# EAGLE board Dual 13EM7 Board Second (EAGLE 5.11)
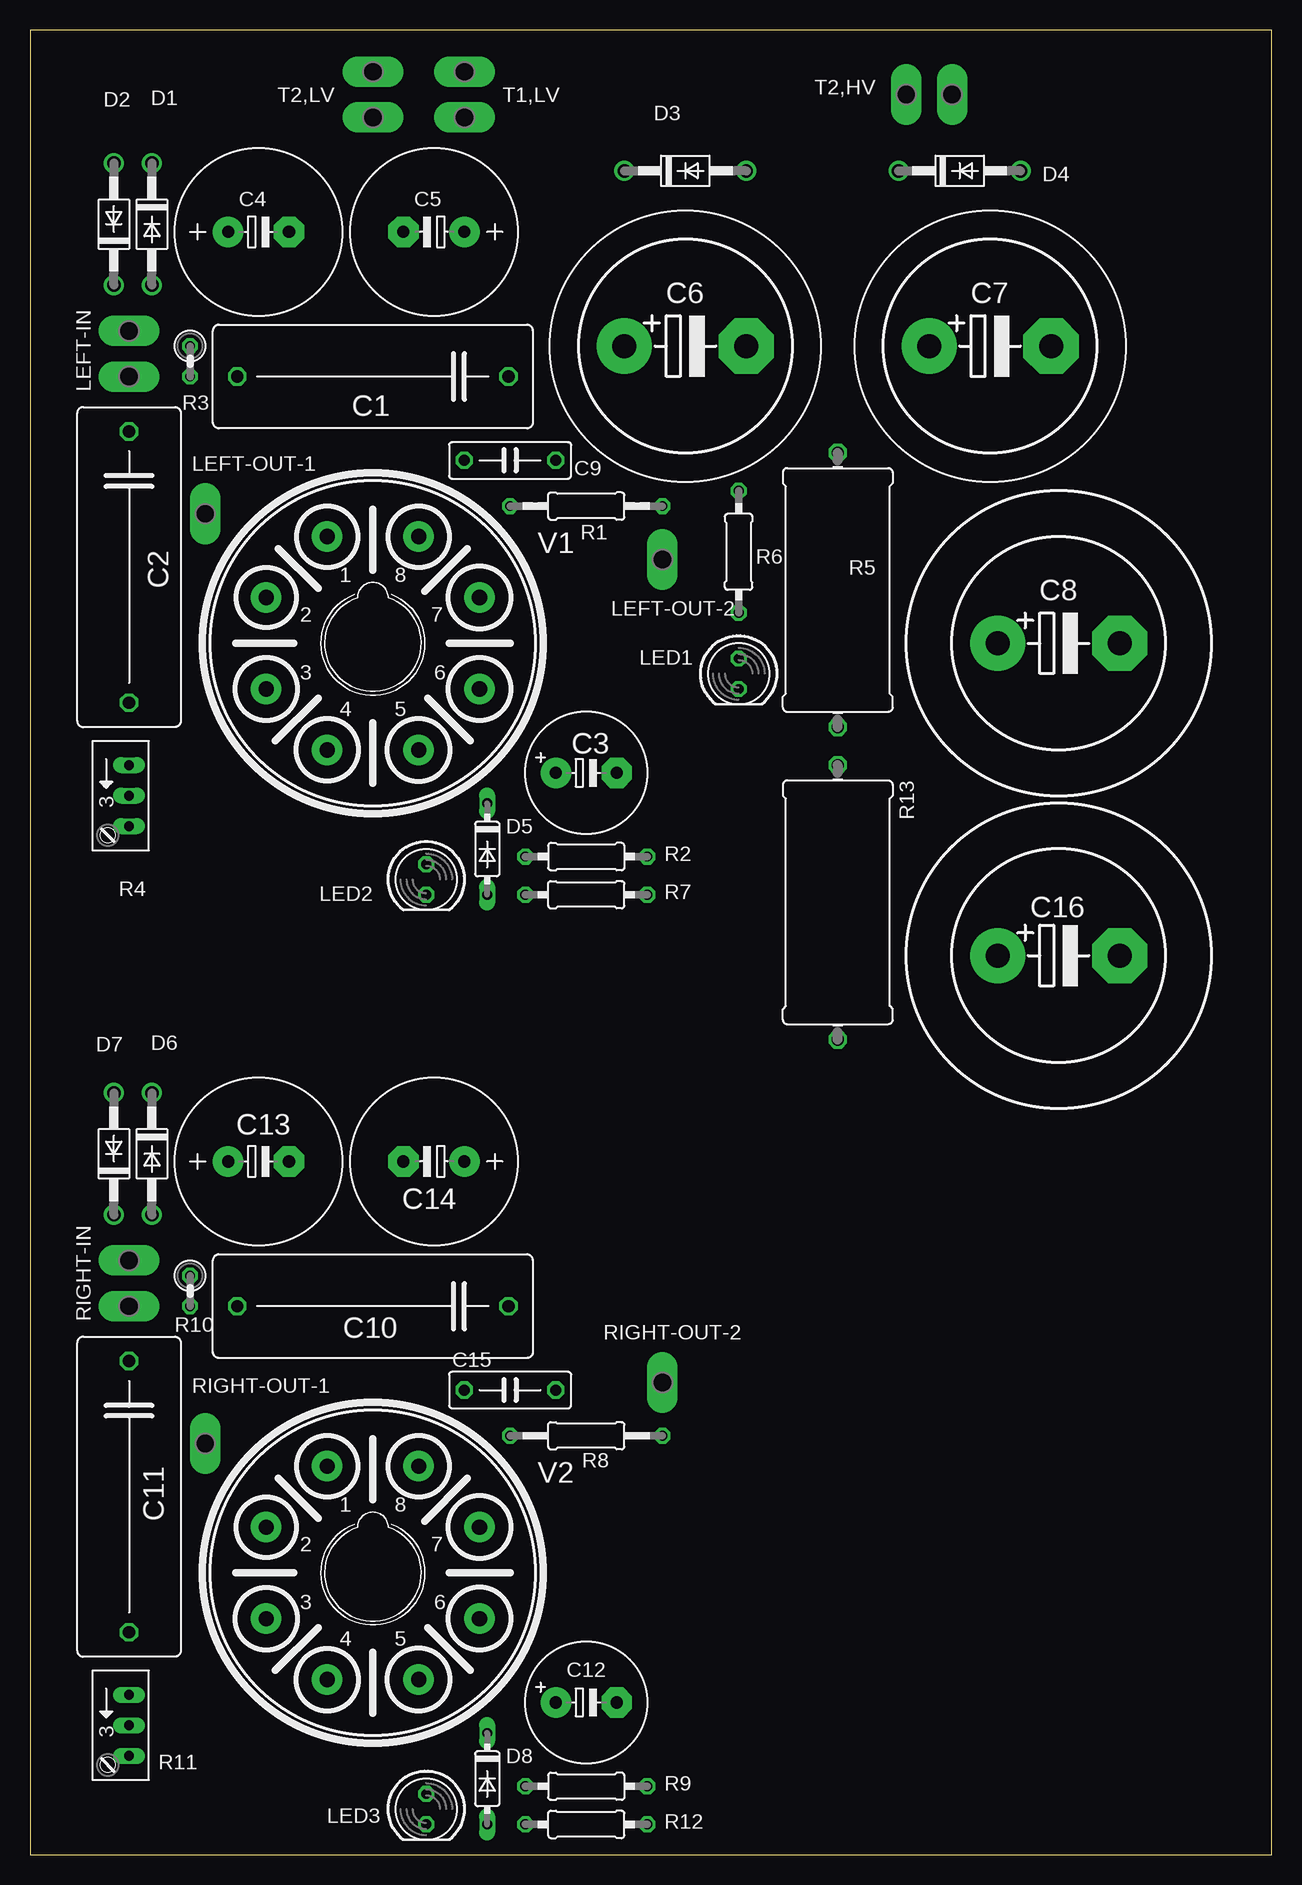
[diagram p0: board, top side]
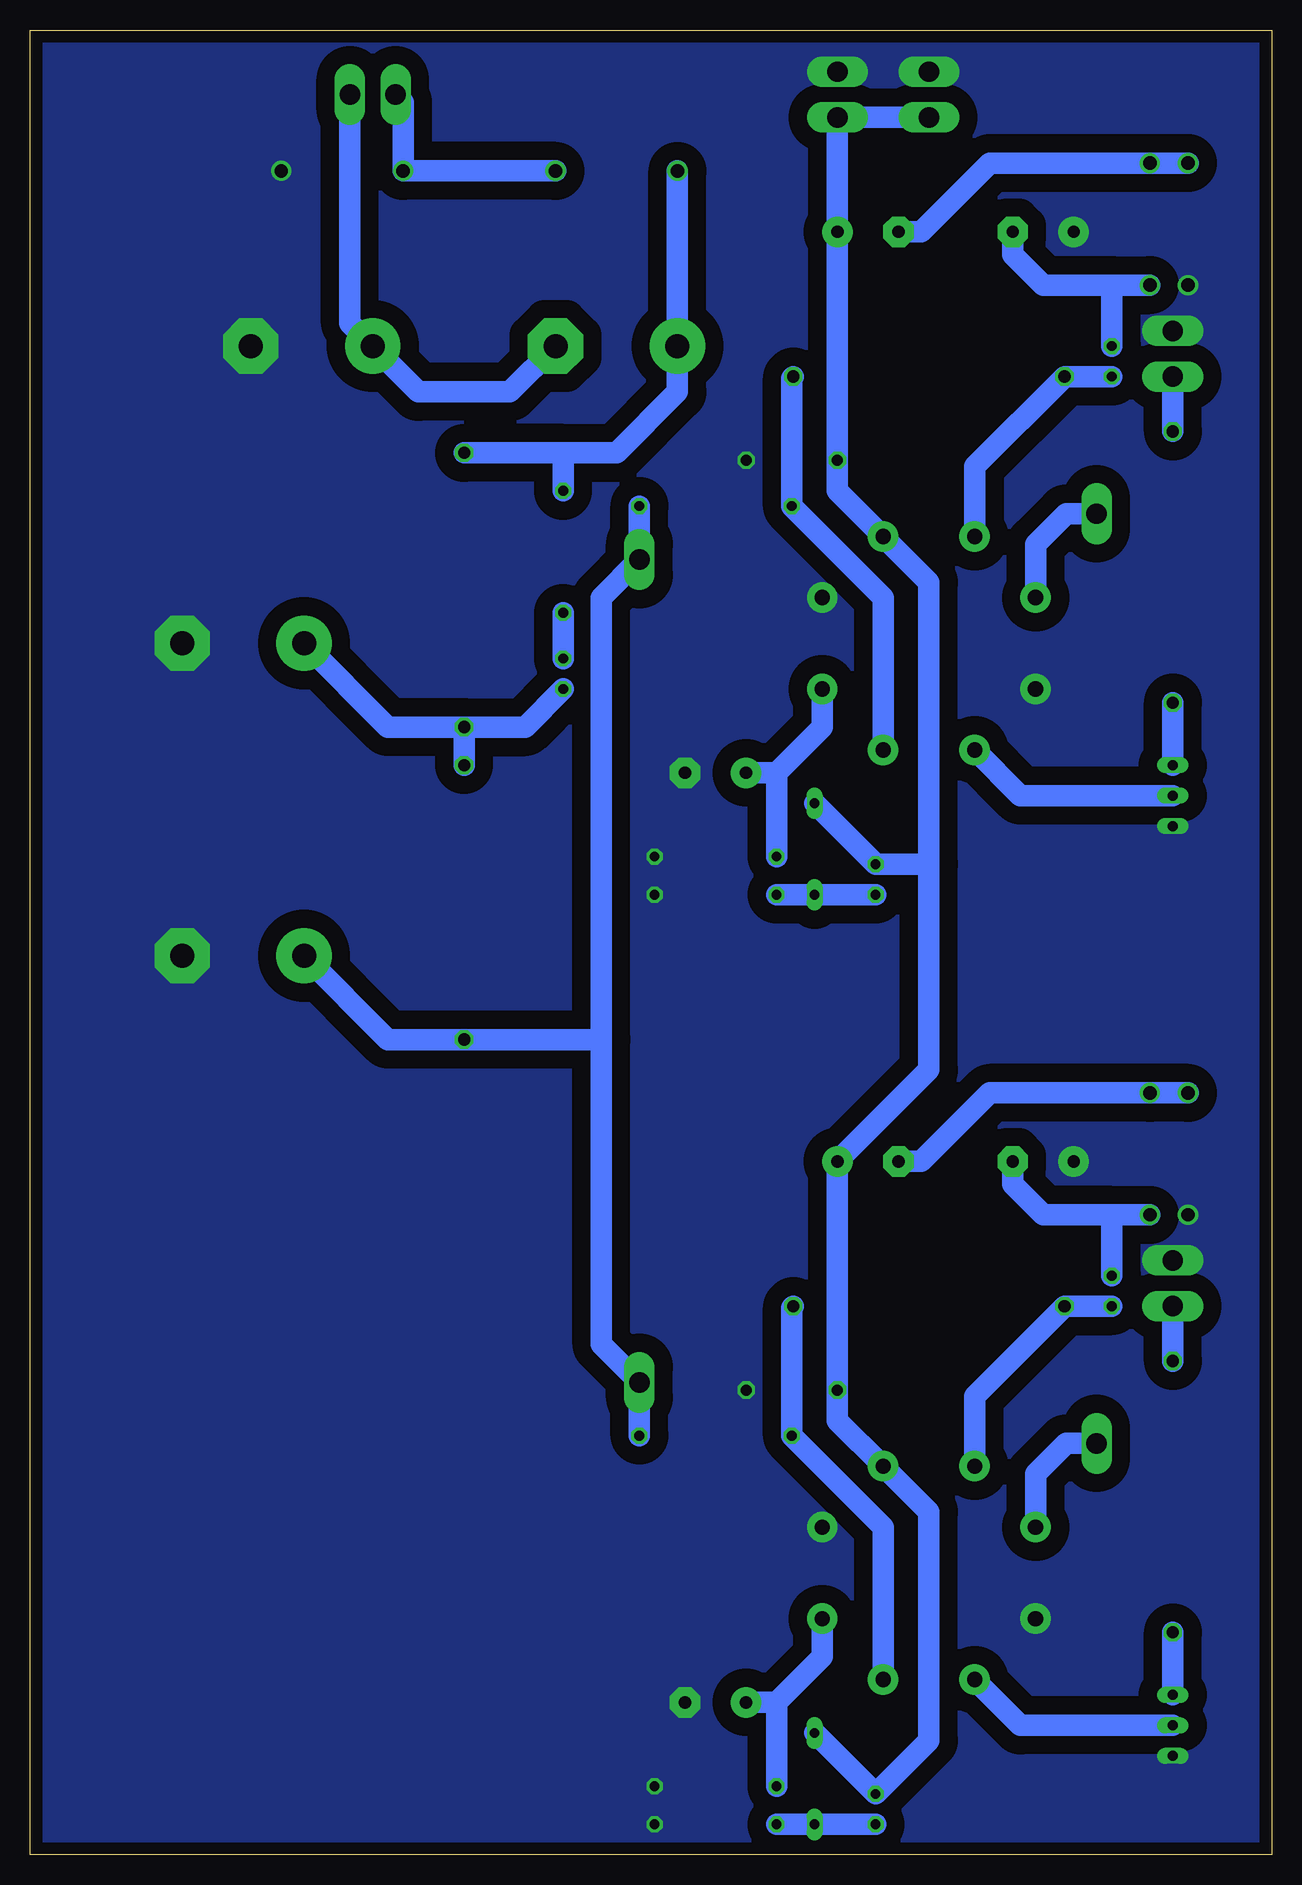
[diagram p1: board, bottom side, seen from below]

Size 103.48 x 152.07 mm. Coordinates in mm from the lower left corner, seen from the top.
Outline: 0,0 103.48,0 103.48,152.07 0,152.07 0,0
Copper layers (1*16): Top 0.035mm / dielectric 1.5mm / Bottom 0.035mm
Design rules "default *": minimum track width 10mil, minimum drill 24mil, track to track 60mil, track to pad 60mil, pad to pad 60mil, via to via 60mil, smd to smd 60mil, copper to edge 40mil, drill to drill 8mil, minimum pad ring 10mil, minimum via ring 8mil, stop-mask expansion 4mil, vias tented up to drill 0mil, thermal gap 10mil

## Footprints (pad centres in the part's own frame; a part is rotated, then mirrored left to right if it is on the bottom)
C225-087X268 = drill 1.016 octagon: 1 -11.303,0; 2 11.303,0
E5-10,5 = drill 1.016 pad 2.54 round: + -2.54,0 | drill 1.016 pad 2.54 octagon: - 2.54,0
E5-13 = drill 1.016 pad 2.54 round: + -2.54,0 | drill 1.016 pad 2.54 octagon: - 2.54,0
EB22,5D = drill 2.007 pad 4.597 round: + -5.08,0 | drill 2.007 pad 4.597 octagon: - 5.08,0
EB25D = drill 2.007 pad 4.597 round: + -5.08,0 | drill 2.007 pad 4.597 octagon: - 5.08,0
C075-032X103 = drill 0.914 octagon: 1 -3.81,0; 2 3.81,0
DO41-10 = drill 1.118 round: A 5.08,0; C -5.08,0
DO35-7 = drill 0.813 long: A 3.81,0; C -3.81,0
LED5MM = drill 0.813 octagon: A -1.27,0; K 1.27,0
P2-38-17 = drill 1.702 pad 2.121 long: TP-1 -1.905,0; TP-2 1.905,0
P1-17Y = drill 1.702 pad 2.121 long: TP 0,0
0207/12 = drill 0.813 octagon: 1 -6.35,0; 2 6.35,0
0207/10 = drill 0.813 octagon: 1 -5.08,0; 2 5.08,0
0207/2V = drill 0.813 octagon: 1 -1.27,0; 2 1.27,0
RJ9W = drill 0.813 long: A 2.54,0.635; E -2.54,0.635; S 0,0.635
0922/22 = drill 1.016 octagon: 1 -11.43,0; 2 11.43,0
OKTAL = drill 1.27 pad 2.54 round: 1 3.81,-8.89; 2 8.89,-3.81; 3 8.89,3.81; 4 3.81,8.89; 5 -3.81,8.89; 6 -8.89,3.81; 7 -8.89,-3.81; 8 -3.81,-8.89

## Placement (x,y rotation side)
C1  0.015uF  [C225-087X268]  28.57,123.19 180 top
C2  0.1uF  [C225-087X268]  8.26,107.31 270 top
C3  100uF  [E5-10,5]  46.36,90.17 0 top
C4  470uF  [E5-13]  19.05,135.25 0 top
C5  470uF  [E5-13]  33.66,135.25 180 top
C6  470uF  [EB22,5D]  54.61,125.73 0 top
C7  470uF  [EB22,5D]  80.01,125.73 0 top
C8  100uF  [EB25D]  85.72,100.97 0 top
C9  0.1uF  [C075-032X103]  40.01,116.2 0 top
C10  0.015uF  [C225-087X268]  28.57,45.72 180 top
C11  0.1uF  [C225-087X268]  8.26,29.84 270 top
C12  100uF  [E5-10,5]  46.36,12.7 0 top
C13  470uF  [E5-13]  19.05,57.78 0 top
C14  470uF  [E5-13]  33.66,57.78 180 top
C15  0.1uF  [C075-032X103]  40.01,38.73 0 top
C16  100uF  [EB25D]  85.72,74.93 0 top
D1  1N4002  [DO41-10]  10.16,135.89 270 top
D2  1N4002  [DO41-10]  6.99,135.89 90 top
D3  1N4007  [DO41-10]  54.61,140.34 0 top
D4  1N4007  [DO41-10]  77.47,140.34 0 top
D5  1N4148  [DO35-7]  38.1,83.82 270 top
D6  1N4002  [DO41-10]  10.16,58.42 270 top
D7  1N4002  [DO41-10]  6.99,58.42 90 top
D8  1N4148  [DO35-7]  38.1,6.35 270 top
LED1  BLUE  [LED5MM]  59.05,98.42 270 top
LED2  GREEN  [LED5MM]  33.02,81.28 270 top
LED3  GREEN  [LED5MM]  33.02,3.81 270 top
LEFT-IN  PTR2  [P2-38-17]  8.26,125.09 90 top
LEFT-OUT-1  PTR1PAD1-17Y  [P1-17Y]  14.61,111.76 0 top
LEFT-OUT-2  PTR1PAD1-17Y  [P1-17Y]  52.71,107.95 0 top
R1  47K  [0207/12]  46.36,112.39 0 top
R2  820R  [0207/10]  46.36,83.19 180 top
R3  470K  [0207/2V]  13.34,124.46 270 top
R4  100K  [RJ9W]  7.62,88.27 270 top
R5  100R 1W  [0922/22]  67.31,105.41 270 top
R6  330R  [0207/10]  59.05,108.58 90 top
R7  1K  [0207/10]  46.36,80.01 0 top
R8  47K  [0207/12]  46.36,34.92 0 top
R9  820R  [0207/10]  46.36,5.71 180 top
R10  470K  [0207/2V]  13.34,46.99 270 top
R11  100K  [RJ9W]  7.62,10.79 270 top
R12  1K  [0207/10]  46.36,2.54 0 top
R13  100R 1W  [0922/22]  67.31,79.38 270 top
RIGHT-IN  PTR2  [P2-38-17]  8.26,47.62 90 top
RIGHT-OUT-1  PTR1PAD1-17Y  [P1-17Y]  14.61,34.29 0 top
RIGHT-OUT-2  PTR1PAD1-17Y  [P1-17Y]  52.71,39.37 0 top
T1,LV  PTR2  [P2-38-17]  36.2,146.69 90 top
T2,HV  PTR2  [P2-38-17]  74.93,146.69 0 top
T2,LV  PTR2  [P2-38-17]  28.57,146.69 90 top
V1  13EM7  [OKTAL]  28.57,100.97 180 top
V2  13EM7  [OKTAL]  28.57,23.5 180 top

## Library data of the parts
C1-C8 C10-C14 C16 = rcl
C9 C15 R1-R3 R5-R10 R12 R13 = resistor
D1-D8 = diode
LED1-LED3 = led
LEFT-IN LEFT-OUT-1 LEFT-OUT-2 RIGHT-IN RIGHT-OUT-1 RIGHT-OUT-2 T1,LV T2,HV T2,LV = testpad
R4 R11 = pot
V1 V2 = tubes

## Nets
GND: C3.- C4.+ C7.- C8.- C9.2 C12.- C13.+ C15.2 C16.- D2.C D4.A D7.C LEFT-IN.TP-2 R2.1 R4.A R7.2 R9.1 R11.A R12.2 RIGHT-IN.TP-2 T1,LV.TP-2 T2,LV.TP-2 V1.3 V1.7 V2.3 V2.7
HEATER: C5.+ C9.1 C14.+ C15.1 D5.C D8.C LED2.A LED3.A T1,LV.TP-1 T2,LV.TP-1 V1.8 V2.8
N$1: C1.1 R1.1 V1.5
N$2: C3.+ R2.2 V1.6
N$3: C1.2 R3.2 V1.1
N$4: LEFT-OUT-1.TP V1.2
N$5: C2.2 R4.E
N$6: R4.S V1.4
N$7: C2.1 LEFT-IN.TP-1
N$8: C4.- D1.A R3.1
N$9: C5.- D1.C D2.A
N$10: C10.1 R8.1 V2.5
N$11: LED1.A R6.1
N$12: D3.A D4.C T2,HV.TP-1
N$13: C6.- C7.+ T2,HV.TP-2
N$14: C6.+ D3.C R5.1 R6.2
N$15: D5.A LED2.K R7.1
N$16: C12.+ R9.2 V2.6
N$17: C10.2 R10.2 V2.1
N$18: C11.2 R11.E
N$19: R11.S V2.4
N$20: C11.1 RIGHT-IN.TP-1
N$21: RIGHT-OUT-1.TP V2.2
N$22: C13.- D6.A R10.1
N$23: C14.- D6.C D7.A
N$24: D8.A LED3.K R12.1
N$25: C8.+ LED1.K R5.2 R13.1
V+: C16.+ LEFT-OUT-2.TP R1.2 R8.2 R13.2 RIGHT-OUT-2.TP

## Tracks (layer width: path | path; a pad name or v marks a point on that pad's centre or on a via)
GND
  pour Bottom (no thermals): -0.64,152.4 -0.64,0 103.5,0 103.5,152.4
HEATER
  Bottom 1.778: T2,LV.TP-1 T1,LV.TP-1 C5.+ C9.1 36.2,113.67 V1.8 28.57,106.05 28.57,82.55 | 28.57,82.55 28.57,65.41 C14.+ C15.1 36.2,36.2 V2.8 28.57,28.57 28.57,9.53 LED3.A D8.C | 28.57,82.55 LED2.A D5.C
N$1
  Bottom 1.778: V1.5 32.39,104.78 R1.1 40.01,123.06 C1.1
N$2
  Bottom 1.778: R2.2 41.27,90.17 | 41.27,90.17 C3.+ | V1.6 37.47,93.98 41.27,90.17
N$3
  Bottom 1.778: R3.2 C1.2 24.76,115.7 V1.1
N$4
  Bottom 1.778: LEFT-OUT-1.TP 17.14,111.76 19.68,109.22 V1.2
N$5
  Bottom 1.778: R4.E C2.2
N$6
  Bottom 1.778: R4.S 20.95,88.27 V1.4
N$7
  Bottom 1.778: C2.1 LEFT-IN.TP-1
N$8
  Bottom 1.778: 13.34,130.81 D1.A | 13.34,130.81 19.05,130.81 21.59,133.35 C4.- | R3.1 13.34,130.81
N$9
  Bottom 1.778: D2.A D1.C 23.49,140.97 29.21,135.25 C5.-
N$10
  Bottom 1.778: V2.5 32.39,27.3 R8.1 40.01,45.59 C10.1
N$11
  Bottom 1.778: LED1.A R6.1
N$12
  Bottom 1.778: D3.A D4.C 72.39,146.05 T2,HV.TP-1
N$13
  Bottom 1.778: T2,HV.TP-2 76.83,127.64 C7.+ 71.12,121.92 63.5,121.92 C6.-
N$14
  Bottom 1.778: D3.C C6.+ 49.53,121.92 54.61,116.84 59.05,116.84 | 59.05,116.84 R5.1 | R6.2 59.05,116.84
N$15
  Bottom 1.778: R7.1 D5.A LED2.K
N$16
  Bottom 1.778: V2.6 37.47,16.51 41.27,12.7 | R9.2 41.27,12.7 | 41.27,12.7 C12.+
N$17
  Bottom 1.778: R10.2 C10.2 24.76,38.23 V2.1
N$18
  Bottom 1.778: R11.E C11.2
N$19
  Bottom 1.778: R11.S 20.95,10.79 V2.4
N$20
  Bottom 1.778: C11.1 RIGHT-IN.TP-1
N$21
  Bottom 1.778: V2.2 19.68,31.75 17.14,34.29 RIGHT-OUT-1.TP
N$22
  Bottom 1.778: 13.34,53.34 D6.A | 13.34,53.34 19.05,53.34 21.59,55.88 C13.- | R10.1 13.34,53.34
N$23
  Bottom 1.778: D7.A D6.C 23.49,63.5 29.21,57.78 C14.-
N$24
  Bottom 1.778: R12.1 D8.A LED3.K
N$25
  Bottom 1.778: R5.2 62.23,93.98 LED1.K | R13.1 R5.2 | R5.2 73.66,93.98 C8.+
V+
  Bottom 1.778: R8.2 RIGHT-OUT-2.TP 55.88,42.55 55.88,67.94 | R1.2 LEFT-OUT-2.TP 55.88,104.78 55.88,67.94 | C16.+ 73.66,67.94 R13.2 55.88,67.94